# Altium PCB LM2596_Power_Supply_Adjustable.PcbDoc
Units mm, origin at the board's own origin, x right, y up, seen from the top; angles counter-clockwise.
Board outline 62.61 x 24.77 mm, 2 copper layers (Top Layer, Bottom Layer); 12 components, 5 nets, 29 pads, 0 vias.
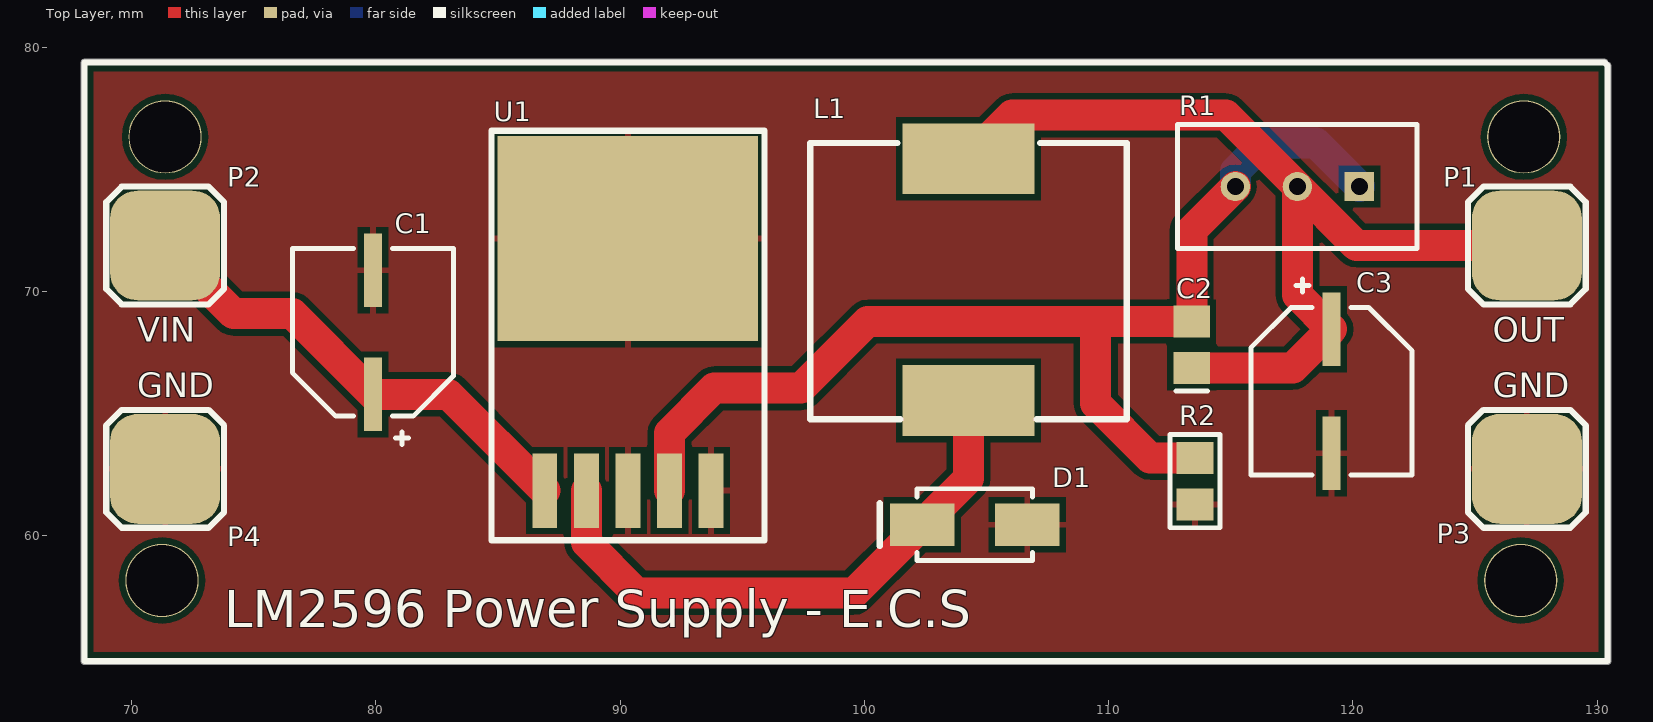
[diagram p0: Top Layer view]
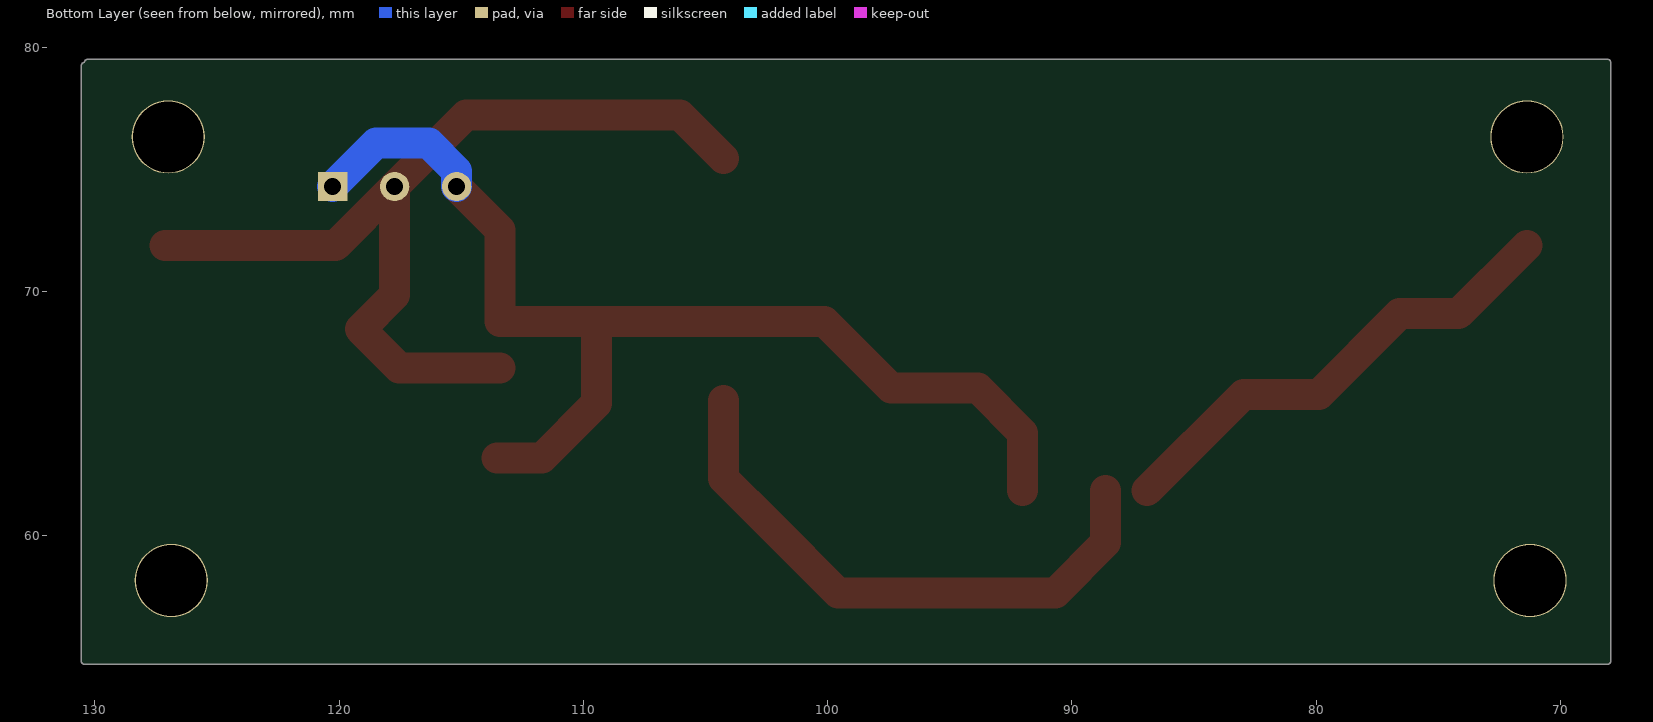
[diagram p1: Bottom Layer view, seen from below]
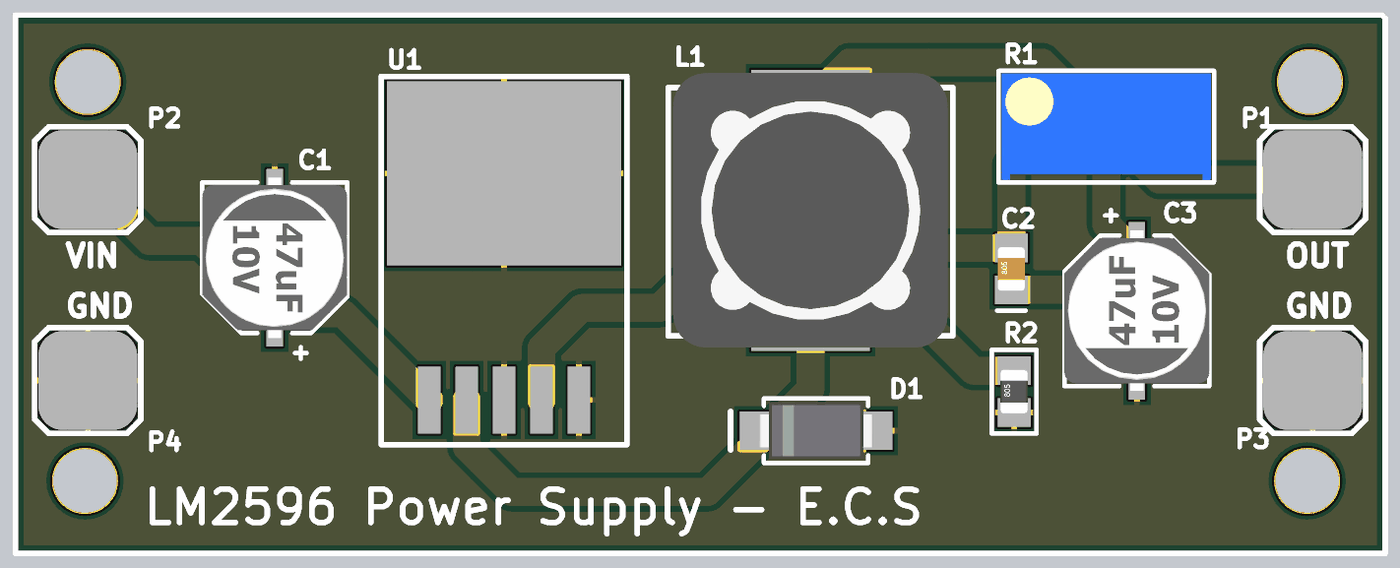
[diagram p2: 3D render of the assembled board from above, using the file's embedded part models]

## Layer stack, top to bottom
Top Solder: solder mask 0.0102, Solder Resist, Dk 3.5
Top Layer: signal copper 0.0356
Dielectric 1: dielectric 0.32, FR-4, Dk 4.8
Bottom Layer: signal copper 0.0356
Bottom Solder: solder mask 0.0102, Solder Resist, Dk 3.5

## Board outline
67.945,54.864 ccw(c68.072,54.864) 68.072,54.737 130.429,54.737 ccw(c130.429,54.864) 130.556,54.864 130.556,79.248 ccw(c130.429,79.248) 130.429,79.375 ccw(c130.302,79.375) 130.302,79.502 68.072,79.502 ccw(c68.072,79.375) 67.945,79.375

## Design rules (kind name [scope] priority, off if disabled: settings)
Clearance [All] p1: gap=0.254 ignorepadtopadclearanceinfootprint=FALSE except(0: Arc-Hole Track-Hole SMDPad-Hole THPad-Hole Via-Hole Fill-Hole Poly-Hole Region-Hole Text-Hole)
PolygonConnect [All] p1: connectstyle=Relief reliefconductorwidth=0.254 reliefentries=4 polygonreliefangle="90 Angle" airgapwidth=0.254
RoutingVias [All] p1: holewidth=0.711 width=1.27 viastyle="Through Hole" minholewidth=0.711 minwidth=1.27 maxholewidth=0.711 maxwidth=1.27
SolderMaskExpansion [All] p1: expansion=0.102
Width [All] p1: maxlimit=1.27 minlimit=0.254 preferedwidth=0.762
30 further rules are at their usual default settings.

## Components (designator, comment, footprint, x,y, rotation, side; value= is the part's Value field where it differs from the comment)
C1 "220uF/35V" Cap_Al_SMD_C6_6.6x6.6mm 79.883,68.326 r270 top
C2 "10nF" C2012[0805] 113.411,67.818 r90 top value=1
C3 "220uF/35V" Cap_Al_SMD_C6_6.6x6.6mm 119.126,65.913 r90 top
D1 "MBRA340" DO214AC 104.521,60.452 r180 top
L1 "33uH" Inductor-744770133 104.267,70.485 r180 top
P1 "PAD_SMD-4.5" PAD_SMD_4.5 127.127,71.882 r0 top
P2 "PAD_SMD-4.5" PAD_SMD_4.5 71.374,71.882 r0 top
P3 "PAD_SMD-4.5" PAD_SMD_4.5 127.127,62.738 r0 top
P4 "PAD_SMD-4.5" PAD_SMD_4.5 71.374,62.738 r0 top
R1 "50K" VR1 117.729,74.295 r180 top
R2 "1.21K" R2012[0805] 113.538,62.23 r90 top value=0
U1 "LM2596" 3961-02 90.322,61.849 r270 top

## Footprints (in the part's own frame and the unit in brackets; to place one, negate y for a bottom-side part, rotate by r counter-clockwise, add the part's x,y. Pads: shape width x height; smd on the part's side, far side on the other; paste and mask are expansions set on the pad)
3961-02 [mm]
  rect 3.05x1.016 smd: 1(0,-3.404) 2(0,-1.702) 3(0,0) 4(0,1.702) 5(0,3.404)
  rect 8.38x10.66 smd: 3(-10.315,0)
  silkscreen extent -14.73,-5.59 2.03,5.59, body extent -13.34,-5.08 0.89,5.08, height 4.87
C2012[0805] [mm] "Chip Capacitor; Body 2.0 x 1.2 mm (LxW typ)"
  rect 1.3x1.5 smd: 1(-0.95,0) 2(0.95,0)
  silkscreen extent -1.9,-0.65 -1.9,0.65, body extent -1,-0.62 1,0.63, height 0.8
Cap_Al_SMD_C6_6.6x6.6mm [mm]
  rect 3x0.75 smd: 1(2.54,0) 2(-2.54,0)
  silkscreen extent -3.43,-3.3 4.6,3.3, body extent -3.65,-3.3 3.65,3.3, height 5.9
DO214AC [mm]
  rect 2.65x1.75 smd: 1(-2.15,0) 2(2.15,0)
  silkscreen extent -2.37,-1.47 3.89,1.47, body extent -2.6,-1.3 2.6,1.3, height 2.4
Inductor-744770133 [mm]
  rect 5.4x2.9 smd: 1(0,4.95) 2(0,-4.95)
  silkscreen extent -6.48,-5.59 6.48,5.72, body extent -6.25,-6.25 6.25,6.25, height 7.51
PAD_SMD_4.5 [mm]
  rrect50% 4.5x4.5 smd: 1(0,0)
  silkscreen extent -2.41,-2.41 2.41,2.41
R2012[0805] [mm] "Chip Resistor; Body 2.0 x 1.3 mm (LxW typ)"
  rect 1.3x1.5 smd: 1(-0.95,0) 2(0.95,0)
  silkscreen extent -1.91,-1.02 1.91,1.02, body extent -1,-0.62 1,0.63, height 0.8
VR1 [mm]
  rect 1.2x1.2 hole 0.7: 1(-2.54,0)
  round 1.2 hole 0.7: 2(0,0) 3(2.54,0)
  silkscreen extent -4.9,-2.54 4.9,2.54, body extent -4.76,-2.41 4.77,2.42, height 11.6

## Part data
C1 C3: library part CP, "Polarized Capacitor"
C2: library part C, "Capacitor"
D1: library part "D Zener", "Zener Diode"
L1: library part L, "Inductor"
R1: library part RPot, "Potentiometer", 50K=1K, LatestRevisionDate=17-Jul-2002, LatestRevisionNote="Re-released for DXP Platform.", PackageDescription="Variable Resistor, Thru-Hole; 3 Leads", PackageReference=VR5, Published=8-Jun-2000, Publisher="Altium Limited", Set Position=0.5, Sim Note="Enter the Resistance value and the set point into parameter fields."
R2: library part R, "Resistor"

## Free pads (board coordinates)
  round 3 hole 2.9: 11(71.247,58.166) 11(71.374,76.327) 11(126.873,58.166) 11(127,76.327)

## Nets (pads, with @x,y where several pads share a name; then routed paths per layer and width w, separated by ;. In a path a pad name is that pad's centre, name@x,y a point inside that pad or via, vN(x,y) a via of type N, cw(c..) or ccw(c..) an arc to the next point about the centre after c; other vN are vias at no path point)
GND: C1.2 C3.2 D1.1 P3.1 P4.1 R2.1 U1.3 U1.5
NetC1_1: C1.1 P2.1 U1.1 | length 19.7
  Top Layer w1.27: P2.1 74.168,69.088 76.581,69.088 C1.1 82.981,65.786 U1.1
NetC2_1: C2.1 C3.1 L1.2 P1.1 R1.2 | length 38.6
  Top Layer w1.27: L1.2 106.048,77.216 114.808,77.216 R1.2 ; C2.1 117.541,66.868 C3.1 117.729,69.85 R1.2 ; P1.1 120.142,71.882 R1.2
NetC2_2: C2.2 R1.1 R1.3 R2.2 U1.4 | length 47.2
  Top Layer w1.27: U1.4 92.024,64.211 93.853,66.04 97.409,66.04 100.137,68.768 109.474,68.768 ; R2.2 111.699,63.18 109.474,65.405 109.474,68.768 ; R1.3 113.411,72.517 C2.2 109.474,68.768
  Bottom Layer w1.27: R1.3 115.189,74.93 116.332,76.073 118.491,76.073 R1.1
NetD1_2: D1.2 L1.1 U1.2 | length 23.8
  Top Layer w1.27: U1.2 88.62,59.716 90.678,57.658 99.577,57.658 D1.2 104.267,62.348 L1.1

## Polygon pours and split planes (outlines as drawn)
GND on Top Layer (solid, pour order 0): 68.453,78.994 130.048,78.994 130.048,55.245 68.453,55.245

## Silkscreen, mask and mechanical layers (free items; w line width, h text height)
Top Overlay:
  lines w0.254: 68.072,54.864 68.072,79.375 130.302,79.375 130.429,79.248 130.429,54.864 68.072,54.864
  text "VIN" at 70.231,67.945 h1
  text "OUT" at 125.73,67.945 h1
  text "GND" at 70.231,65.659 h1
  text "GND" at 125.73,65.659 h1
  text "LM2596 Power Supply - E.C.S" at 73.787,56.261 h1.52